# EAGLE board panstamp-ld-relay (EAGLE 9.0.0)
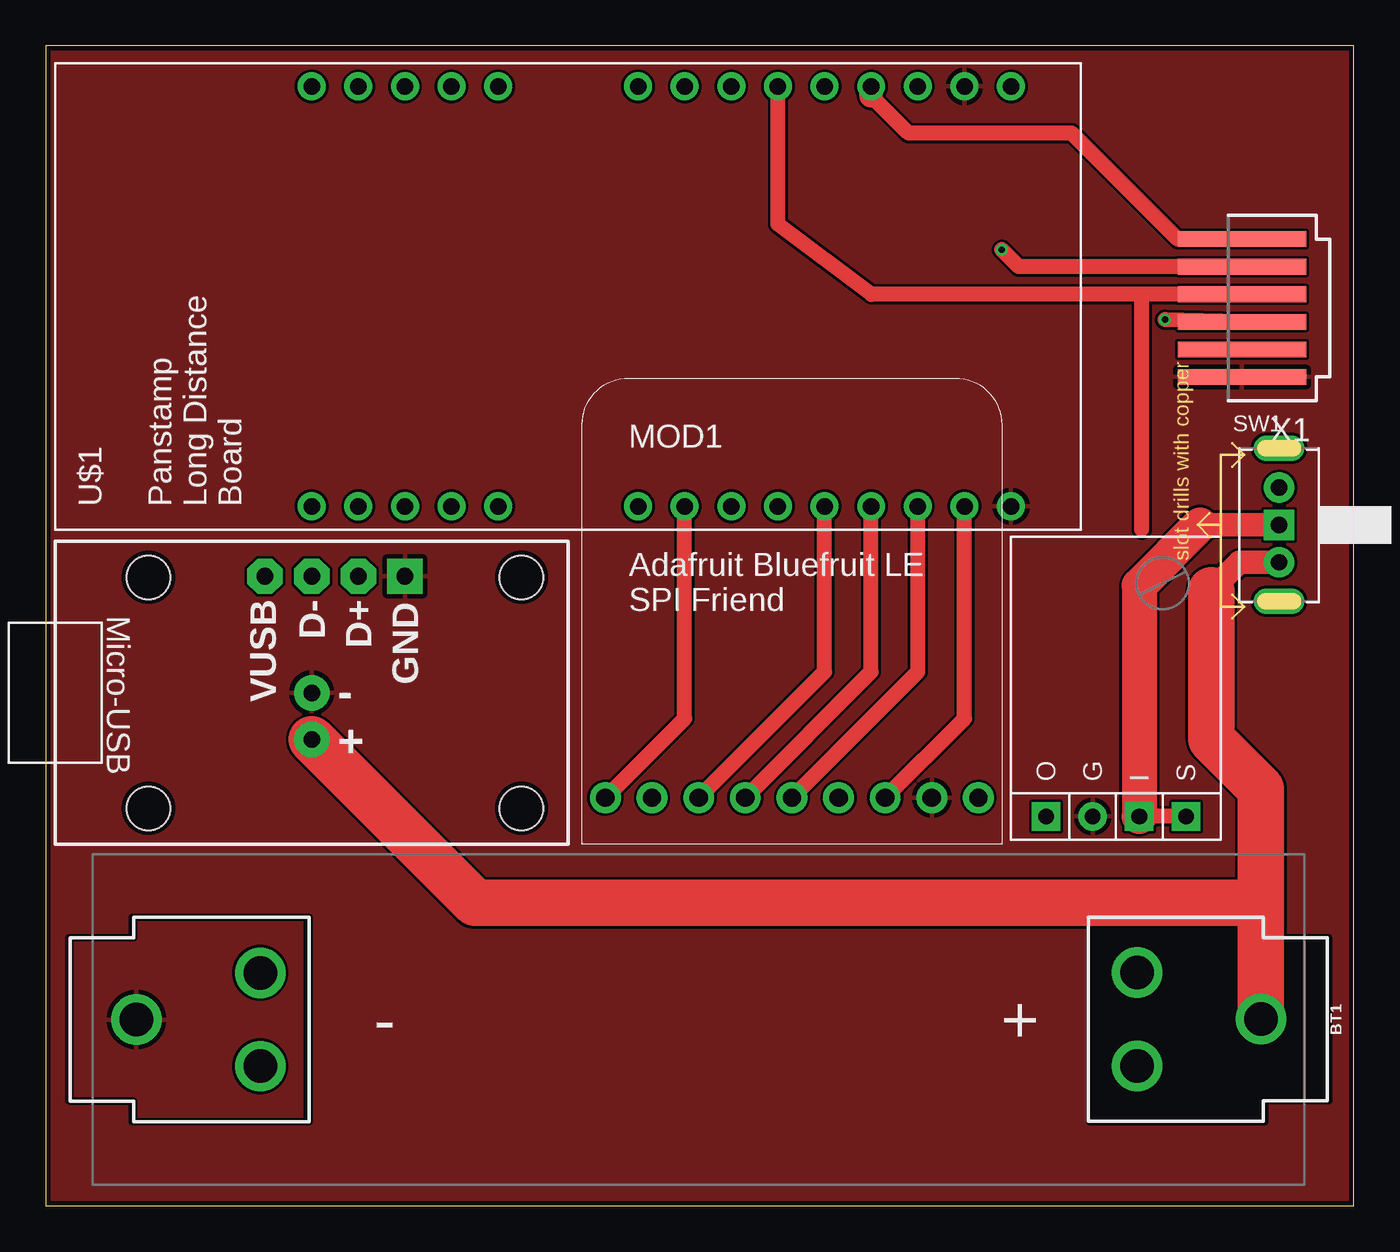
[diagram p0: board, top side]
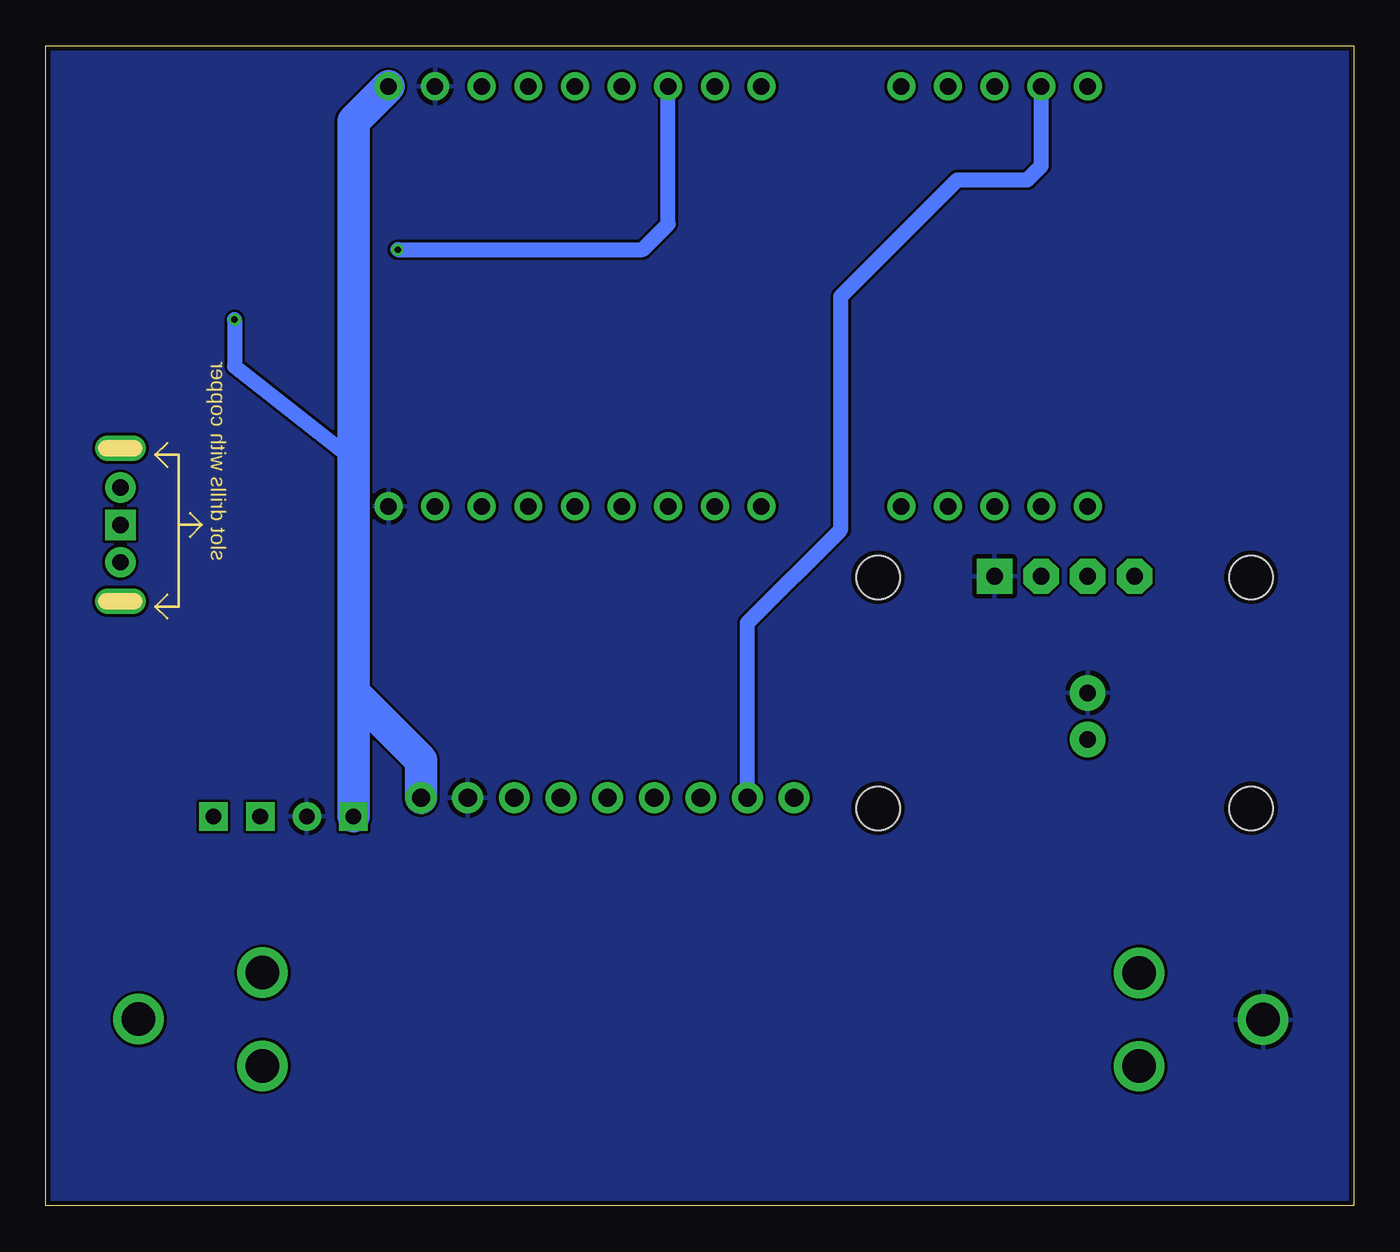
[diagram p1: board, bottom side, seen from below]

Size 71.24 x 63.17 mm. Coordinates in mm from the lower left corner, seen from the top.
Outline: 0,0 71.24,0 71.24,63.17 0,63.17 0,0
Copper layers (1*16): Top 0.035mm / dielectric 1.5mm / Bottom 0.035mm
Design rules "SeeedStudio_2layer_DRU_no_angle_20140221 *": minimum track width 8mil, minimum drill 12mil, track to track 6mil, track to pad 6mil, pad to pad 6mil, via to via 6mil, smd to smd 0mil, copper to edge 10mil, drill to drill 10mil, minimum pad ring 10mil, minimum via ring 6mil, stop-mask expansion 2mil, vias tented up to drill 100mil, thermal gap 10mil

## Footprints (pad centres in the part's own frame; a part is rotated, then mirrored left to right if it is on the bottom)
BATTERY_18650-HOLDER = drill 1.829: GND@1 30.628,0.01; GND@2 23.88,2.55; GND@3 23.88,-2.53; PWR@1 -30.628,-0.01; PWR@2 -23.88,2.53; PWR@3 -23.88,-2.55
BLUEFRUIT-SPI = drill 1 pad 1.676: P$1 1.27,2.54; P$2 3.81,2.54; P$3 6.35,2.54; P$4 8.89,2.54; P$5 11.43,2.54; P$6 13.97,2.54; P$7 16.51,2.54; P$8 19.05,2.54; P$9 21.59,2.54
POLOLU_4P_SIGO = drill 0.85 pad 1.549: G -1.27,-8.89 | drill 0.85 pad 1.549 square: I 1.27,-8.89; O -3.81,-8.89; S 3.81,-8.89
SW5-2.0-8.8X4.4X4.7MM-90D = drill 0.889 pad 1.651: A 0,2.032; B 0,-2.032 | drill 0.889 pad 1.651 square: COM 0,0 | drill 0.762 pad 1.397 long: NC1 0,4.166; NC2 0,-4.166
PANSTAMP-LD = drill 0.9 pad 1.524: P$1 2.54,43.18; P$2 2.54,40.64; P$3 2.54,38.1; P$4 2.54,35.56; P$5 2.54,33.02; P$6 2.54,25.4; P$7 2.54,22.86; P$8 2.54,20.32; P$9 2.54,17.78; P$10 2.54,15.24; P$11 2.54,12.7; P$12 2.54,10.16; P$13 2.54,7.62; P$14 2.54,5.08; P$15 25.4,43.18; P$16 25.4,40.64; P$17 25.4,38.1; P$18 25.4,35.56; P$19 25.4,33.02; P$20 25.4,25.4; P$21 25.4,22.86; P$22 25.4,20.32; P$23 25.4,17.78; P$24 25.4,15.24; P$25 25.4,12.7; P$26 25.4,10.16; P$27 25.4,7.62; P$28 25.4,5.08
JS-1965 = drill 0.9 pad 1.93 octagon: P$1 16.51,2.54; P$2 13.97,2.54; P$3 11.43,2.54 | drill 0.9 pad 1.93 square: P$4 8.89,2.54 | drill 0.9 pad 1.93: P$5 13.97,11.43; P$6 13.97,8.89 | hole 2.381: 2.54,2.603; 22.86,2.603; 22.86,15.177; 2.54,15.177
87438-06 = smd 7 x 0.85: 1 0,3.75; 2 0,2.25; 3 0,0.75; 4 0,-0.75; 5 0,-2.25; 6 0,-3.75

## Placement (x,y rotation side)
BT1  [BATTERY_18650-HOLDER]  35.56,10.16 180 top
MOD1  BLUEFRUIT-SPI  [BLUEFRUIT-SPI]  29.21,19.68 0 top
MOD2  POLOLU_S7V8PROD  [POLOLU_4P_SIGO]  58.29,30.1 0 top
SW1  [SW5-2.0-8.8X4.4X4.7MM-90D]  67.18,37.08 0 top
U$1  PANSTAMP-LD  [PANSTAMP-LD]  57.66,35.56 90 top
U$2  JS-1965  [JS-1965]  28.45,36.83 180 top
X1  87438-06  [87438-06]  65.15,48.9 180 top

## Library data of the parts
BT1 = SparkFun-Batteries; PROD_ID: BATT-12327; SF_SKU: PRT-13113
MOD1 MOD2 U$1 U$2 = relay-components
SW1 = Seeed-Switch; MPN: 3P-2.0-90D3P-2.0-90D-REINFORCE
X1 = Components; MPN: 87438-0643; OC_FARNELL: 1756938; OC_NEWARK: 88K3155

## Nets
GND: BT1.GND@1 MOD1.P$8 MOD2.G U$1.P$14 U$1.P$27 U$2.P$4 U$2.P$6 X1.1
N$1: U$1.P$23 X1.4
N$2: MOD1.P$2 U$1.P$16
N$3: MOD1.P$4 U$1.P$11
N$4: MOD1.P$3 U$1.P$10
N$5: MOD1.P$7 U$1.P$13
N$6: MOD1.P$1 U$1.P$7
N$7: MOD2.I MOD2.S SW1.COM
N$8: MOD1.P$5 U$1.P$12
N$9: U$1.P$22 X1.5
N$10: U$1.P$25 X1.6
VBAT: BT1.PWR@1 SW1.B U$2.P$5
VCC: MOD1.P$9 MOD2.O U$1.P$28 X1.3

## Tracks (layer width: path | path; a pad name or v marks a point on that pad's centre or on a via)
GND
  pour Top (isolate 0.1): 0,63.5 72.39,63.5 72.39,0 0,0
  pour Bottom (isolate 0.1): 0,64.14 72.39,64.14 72.39,0 0,0
N$1
  Top 0.813: X1.4 59.69,49.65 | 59.69,49.65 44.97,49.65 39.88,53.47 U$1.P$23 | 59.69,36.83 59.69,49.65
N$2
  Bottom 0.813: MOD1.P$2 33.02,31.75 27.94,36.83 27.94,49.53 21.59,55.88 17.78,55.88 17.02,56.64 U$1.P$16
N$3
  Top 0.813: MOD1.P$4 44.96,29.08 U$1.P$11
N$4
  Top 0.813: MOD1.P$3 42.42,29.08 U$1.P$10
N$5
  Top 0.813: MOD1.P$7 50.04,26.54 U$1.P$13
N$6
  Top 0.813: MOD1.P$1 34.8,26.54 U$1.P$7
N$7
  Top 0.813: MOD2.S MOD2.I
  Top 1.27: SW1.COM 62.87,37.08
  Top 1.905: 62.87,37.08 59.56,33.78 MOD2.I
N$8
  Top 0.813: MOD1.P$5 47.5,29.08 U$1.P$12
N$9  (via drill 0.35)
  Top 0.813: X1.5 52.99,51.15 v52.07,52.07
  Bottom 0.813: v52.07,52.07 38.73,52.07 37.34,53.47 U$1.P$22
N$10
  Top 0.813: X1.6 61.66,52.65 55.88,58.42 46.99,58.42 44.96,60.45
  Top 1.27: 44.96,60.45 U$1.P$25
VBAT
  Top 1.27: SW1.B 65.02,35.05 63.5,33.53
  Top 2.54: 63.5,33.53 63.5,25.4 66.19,22.71 66.19,16.51 | 66.19,16.51 BT1.PWR@1 | U$2.P$5 23.37,16.51 66.19,16.51
VCC  (via drill 0.35)
  Top 0.813: X1.3 v60.96,48.26
  Bottom 0.813: v60.96,48.26 60.96,45.72 54.48,40.64
  Bottom 1.778: MOD2.O 54.48,27.94 | 54.48,27.94 54.48,40.64 54.48,59.05 U$1.P$28 | MOD1.P$9 50.8,24.26 54.48,27.94